# EAGLE board Tremendous Snicket (EAGLE 7.6.0)

Size 73.58 x 63.39 mm. Coordinates in mm from the lower left corner, seen from the top.
Outline: 0,0 56.82,0 56.82,53.33 0,53.33 0,0
Copper layers (1*16): Top 0.035mm / dielectric 1.5mm / Bottom 0.035mm
Design rules "default": minimum track width 10mil, minimum drill 24mil, track to track 8mil, track to pad 8mil, pad to pad 8mil, via to via 8mil, smd to smd 8mil, copper to edge 40mil, drill to drill 8mil, minimum pad ring 10mil, minimum via ring 8mil, stop-mask expansion 4mil, vias tented up to drill 0mil, thermal gap 10mil

## Footprints (pad centres in the part's own frame; a part is rotated, then mirrored left to right if it is on the bottom)
PHOTORESISTOR-2.54 = drill 1 pad 1.5: P$1 -1.27,0; P$2 1.27,0
0207/10 = drill 0.813 octagon: 1 -5.08,0; 2 5.08,0
B25V = drill 0.813 long: A 2.54,0.635; E -2.54,0.635; S 0,0.635
TL1105 = drill 1 pad 1.676: 1 -2.25,3.25; 2 2.25,3.25; 3 -2.25,-3.25; 4 2.25,-3.25
1X3P-2.54-2.54-11.6-3.0-BLACK-MALE = drill 0.889 pad 1.651 square: 1 0,2.54 | drill 0.889 pad 1.651: 2 0,0; 3 0,-2.54
DIL16 = drill 0.813 long: 1 -8.89,-3.81; 2 -6.35,-3.81; 3 -3.81,-3.81; 4 -1.27,-3.81; 5 1.27,-3.81; 6 3.81,-3.81; 7 6.35,-3.81; 8 8.89,-3.81; 9 8.89,3.81; 10 6.35,3.81; 11 3.81,3.81; 12 1.27,3.81; 13 -1.27,3.81; 14 -3.81,3.81; 15 -6.35,3.81; 16 -8.89,3.81
ARDUINO_UNO = drill 1.016 pad 1.88: 0 63.5,50.8; 1 60.96,50.8; 2 58.42,50.8; 3 55.88,50.8; 3.3V 35.56,2.54; 4 53.34,50.8; 5 50.8,50.8; 5V 38.1,2.54; 6 48.26,50.8; 7 45.72,50.8; 8 41.656,50.8; 9 39.116,50.8; 10 36.576,50.8; 11 34.036,50.8; 12 31.496,50.8; 13 28.956,50.8; A0 50.8,2.54; A1 53.34,2.54; A2 55.88,2.54; A3 58.42,2.54; A4 60.96,2.54; A5 63.5,2.54; AREF 23.876,50.8; GND 26.416,50.8; GND. 43.18,2.54; GND.. 40.64,2.54; I/OREF 30.48,2.54; N/C 27.94,2.54; RESET 33.02,2.54; SCL 18.796,50.8; SDA 21.336,50.8; VIN 45.72,2.54 | hole 3.2: 66.04,7.62; 66.04,35.56; 15.24,50.8; 13.97,2.54

## Placement (x,y rotation side)
R1  [PHOTORESISTOR-2.54]  5,60.88 0 top
R2  1k‎Ω  [0207/10]  5,73.58 0 top  (outside the outline)
Rpot2  250k‎Ω  [B25V]  5,35.48 0 top
S1  [TL1105]  5,86.28 0 top  (outside the outline)
S2  [TL1105]  5,98.98 0 top  (outside the outline)
SERVO1  [1X3P-2.54-2.54-11.6-3.0-BLACK-MALE]  5,22.78 0 top
U2  [DIL16]  5,48.18 0 top
U3  [ARDUINO_UNO]  5,10.08 0 top

## Library data of the parts
R1 R2 Rpot2 S1 S2 SERVO1 U2 U3 = AUTODESK_CIRCUITS_BREADBOARD

## Nets
N$1: U2.1
N$2: U2.4
N$3: U2.2
N$4: U2.3
N$5: U2.6
N$6: U2.7
N$7: U2.10
N$8: U2.11
N$9: R2.2 S1.4 S2.4 SERVO1.1 U2.12 U2.13 U3.GND..
N$10: U2.14
N$11: U2.15
N$12: R1.P$2 S1.1 S2.1 SERVO1.2 U2.9 U2.16 U3.5V
N$13: SERVO1.3 U3.3
N$14: U2.8
N$15: U2.5
N$16: R1.P$1 R2.1 U3.A0
N$17: S1.2
N$18: S1.3 U3.A4
N$19: S2.2
N$20: S2.3 U3.A3
N$21: Rpot2.E
N$22: Rpot2.A
N$23: Rpot2.S

## Tracks (layer width: path | path; a pad name or v marks a point on that pad's centre or on a via)
N$9  (6 unrouted)
N$12  (6 unrouted)
N$13  (1 unrouted)
N$16  (2 unrouted)
N$18  (1 unrouted)
N$20  (1 unrouted)